# Altium PCB Axis_Channel_Blade.PcbDoc (part 1 of 2)
Units mm, origin at the board's own origin, x right, y up, seen from the top; angles counter-clockwise.
Board outline 100 x 100 mm, 4 copper layers (Top Layer 1, L2_GND, L3_PWR, Bottom Layer 1), stack 1.556 mm thick; 170 components, 613 nets, 644 pads, 0 vias.
Unrouted connection lines stored in the file: 341.
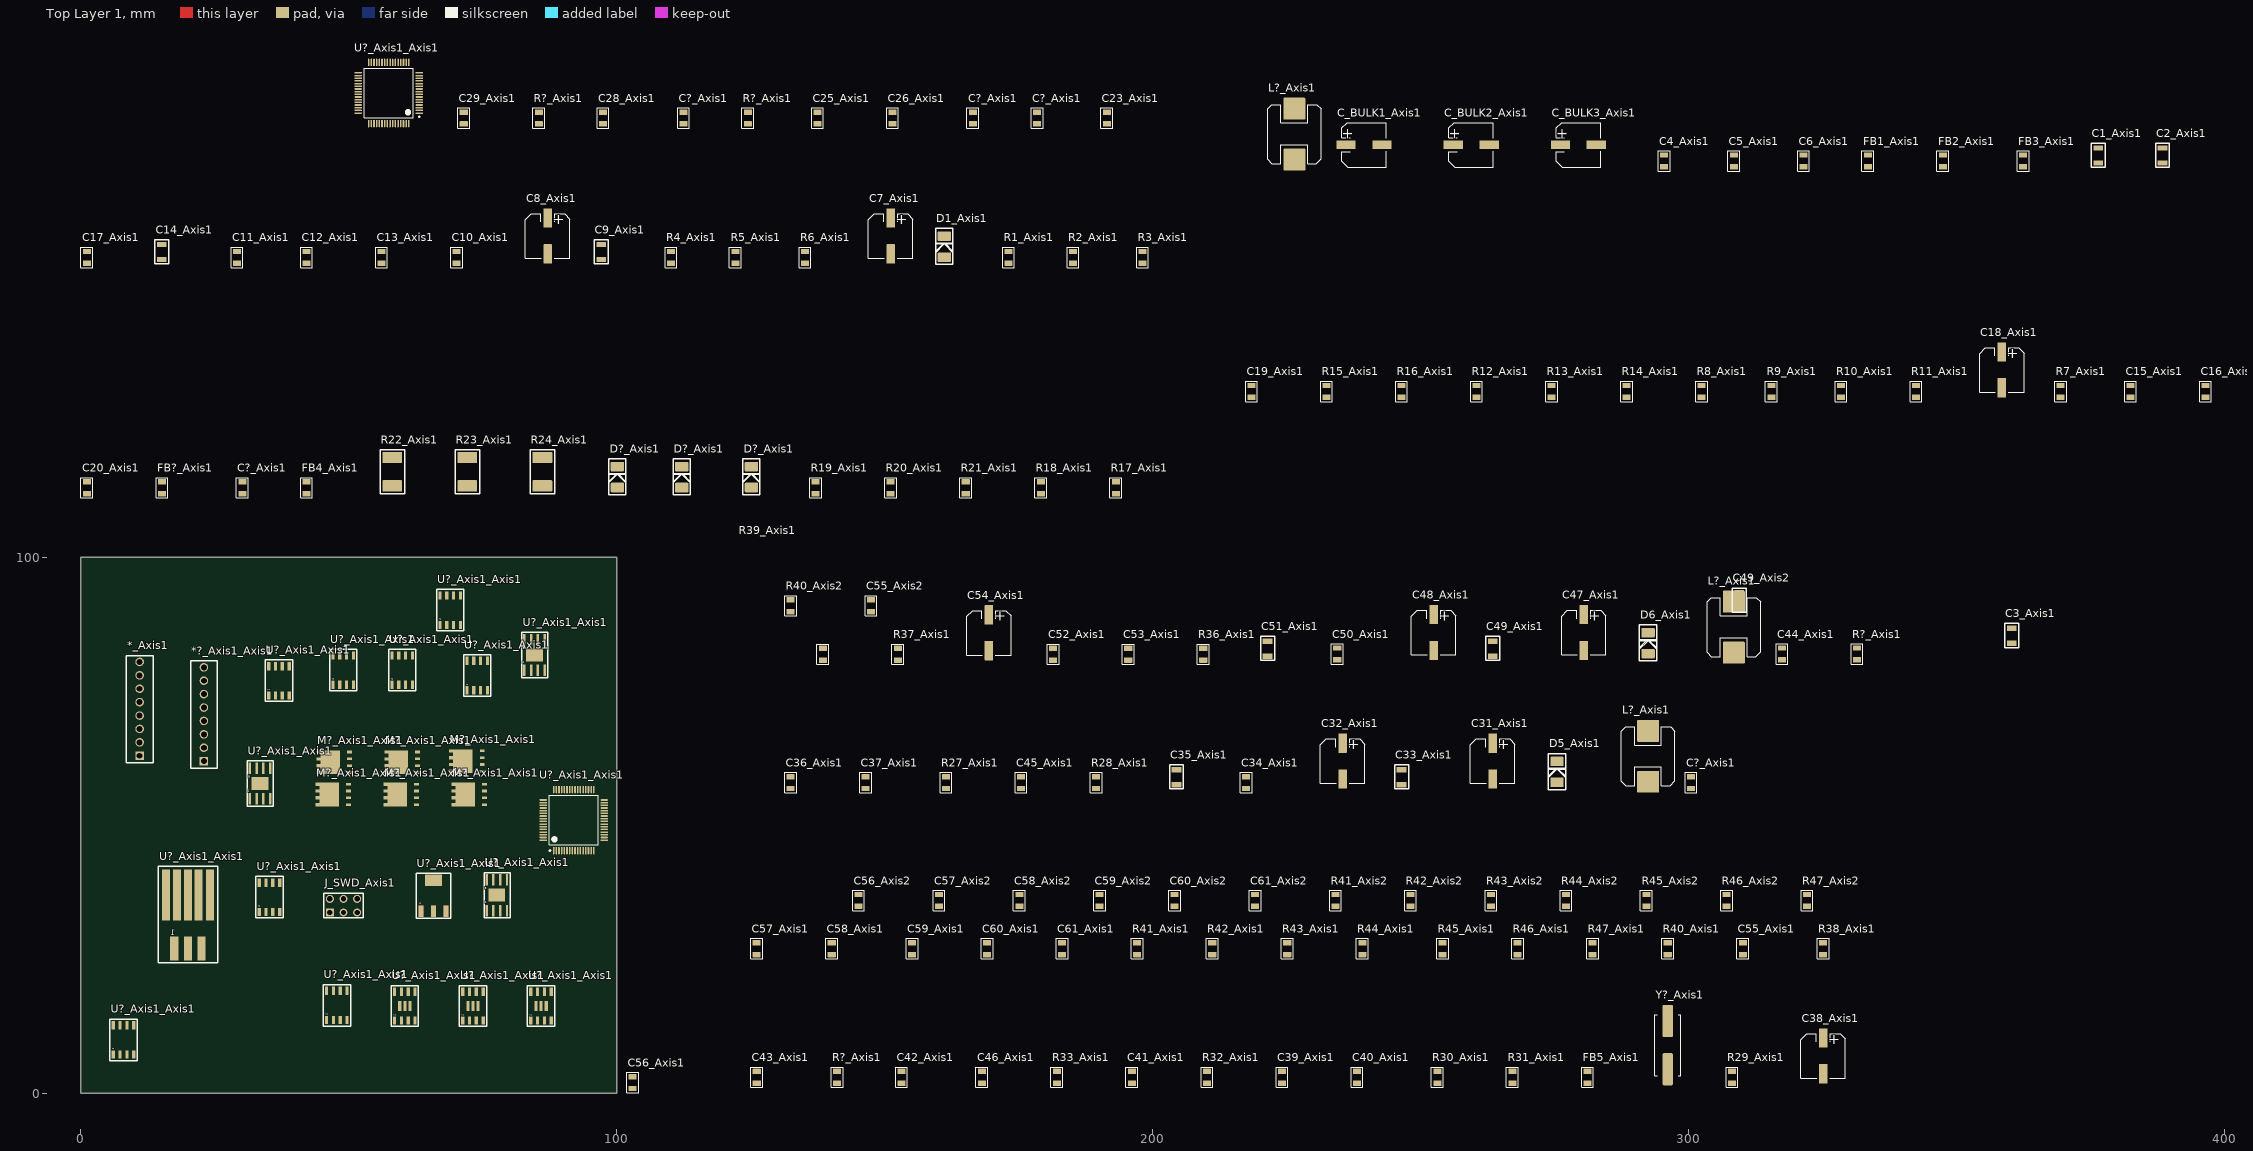
[diagram p0: Top Layer 1 view]
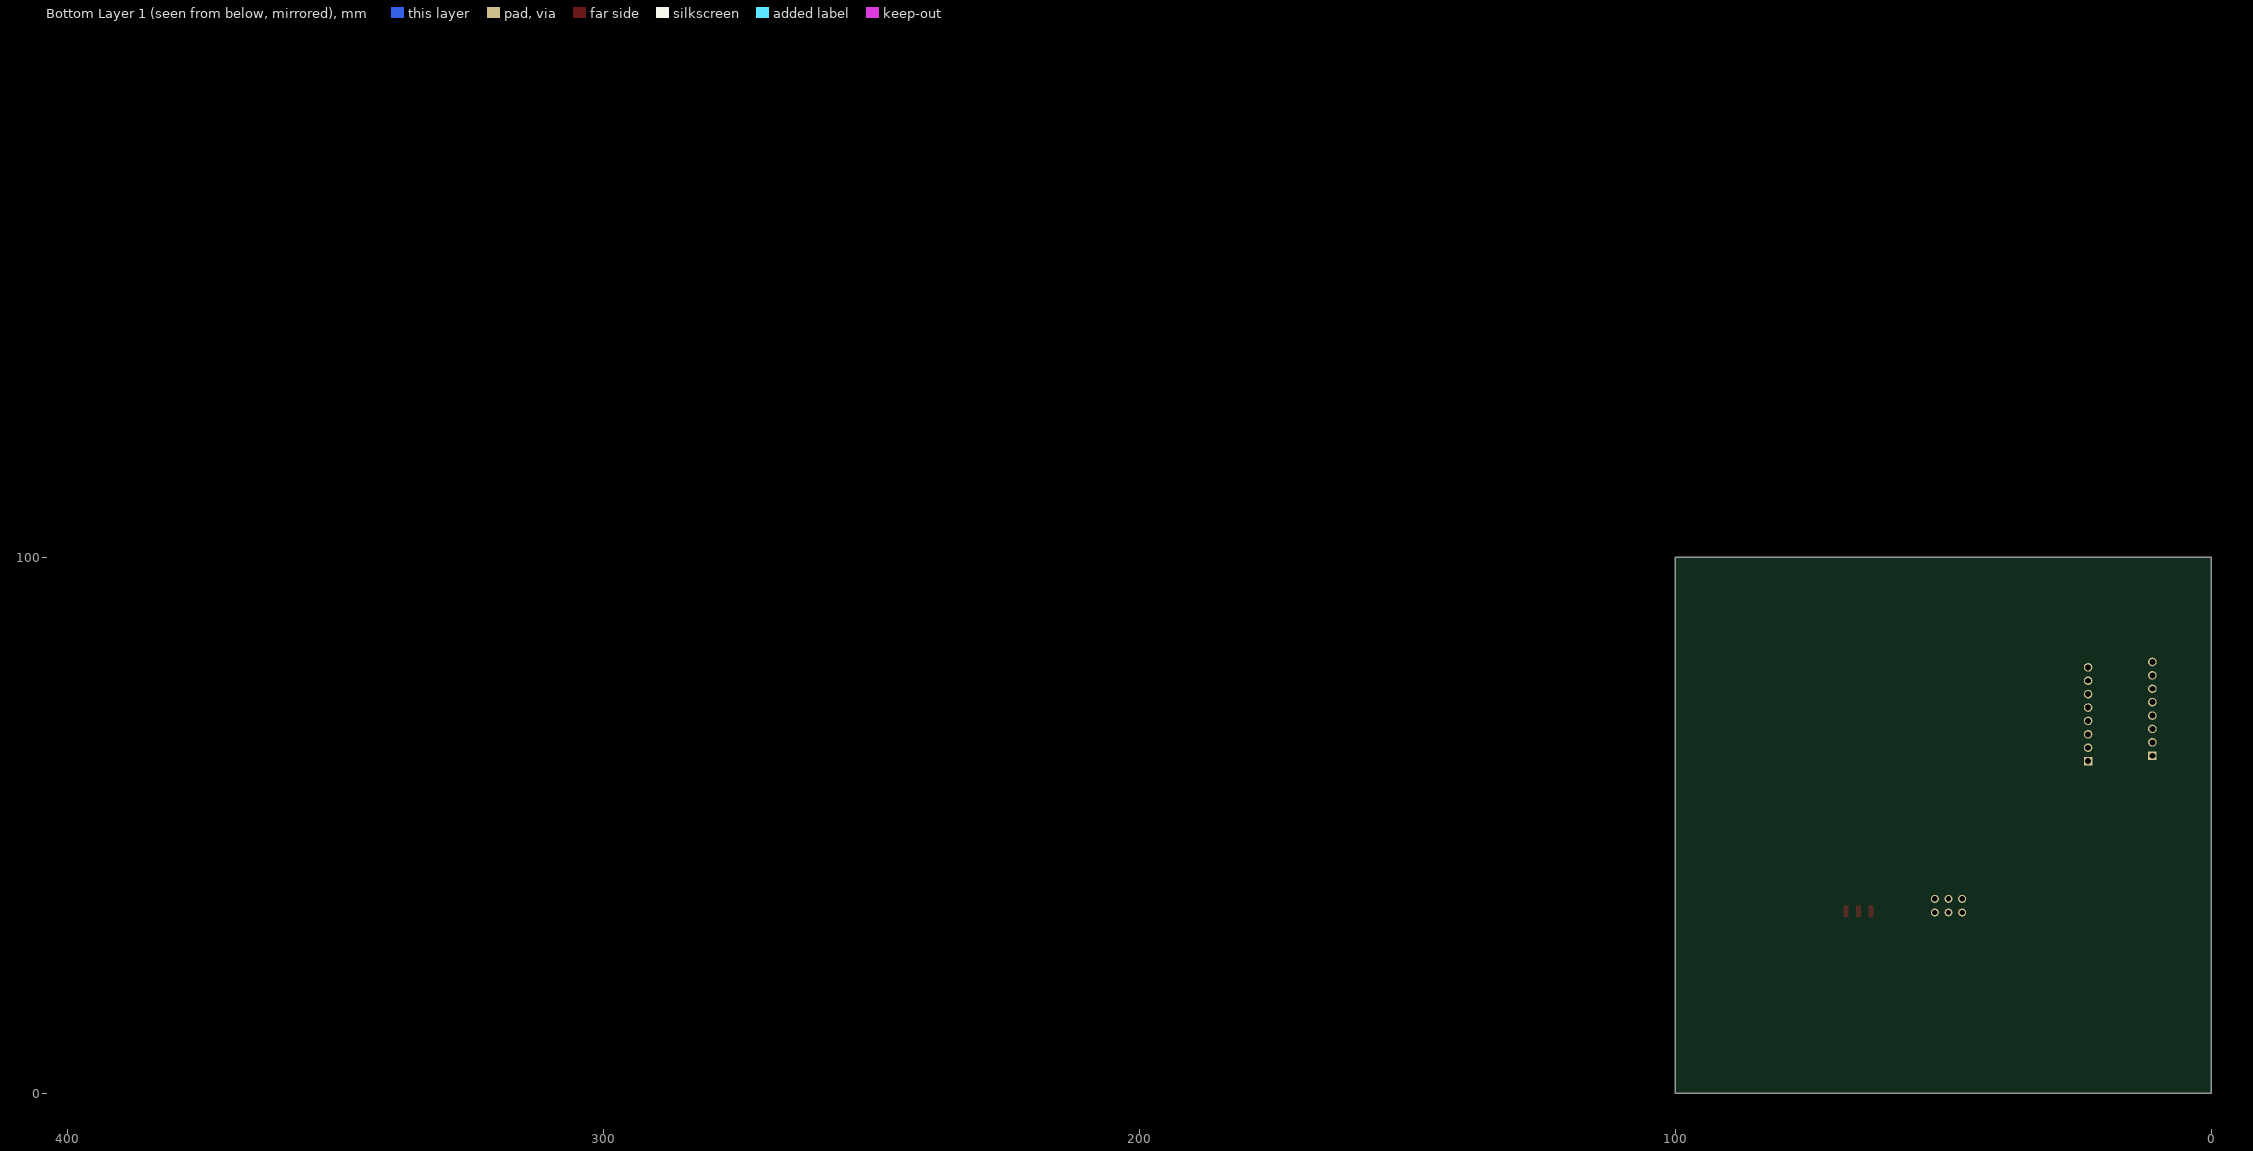
[diagram p1: Bottom Layer 1 view, seen from below]
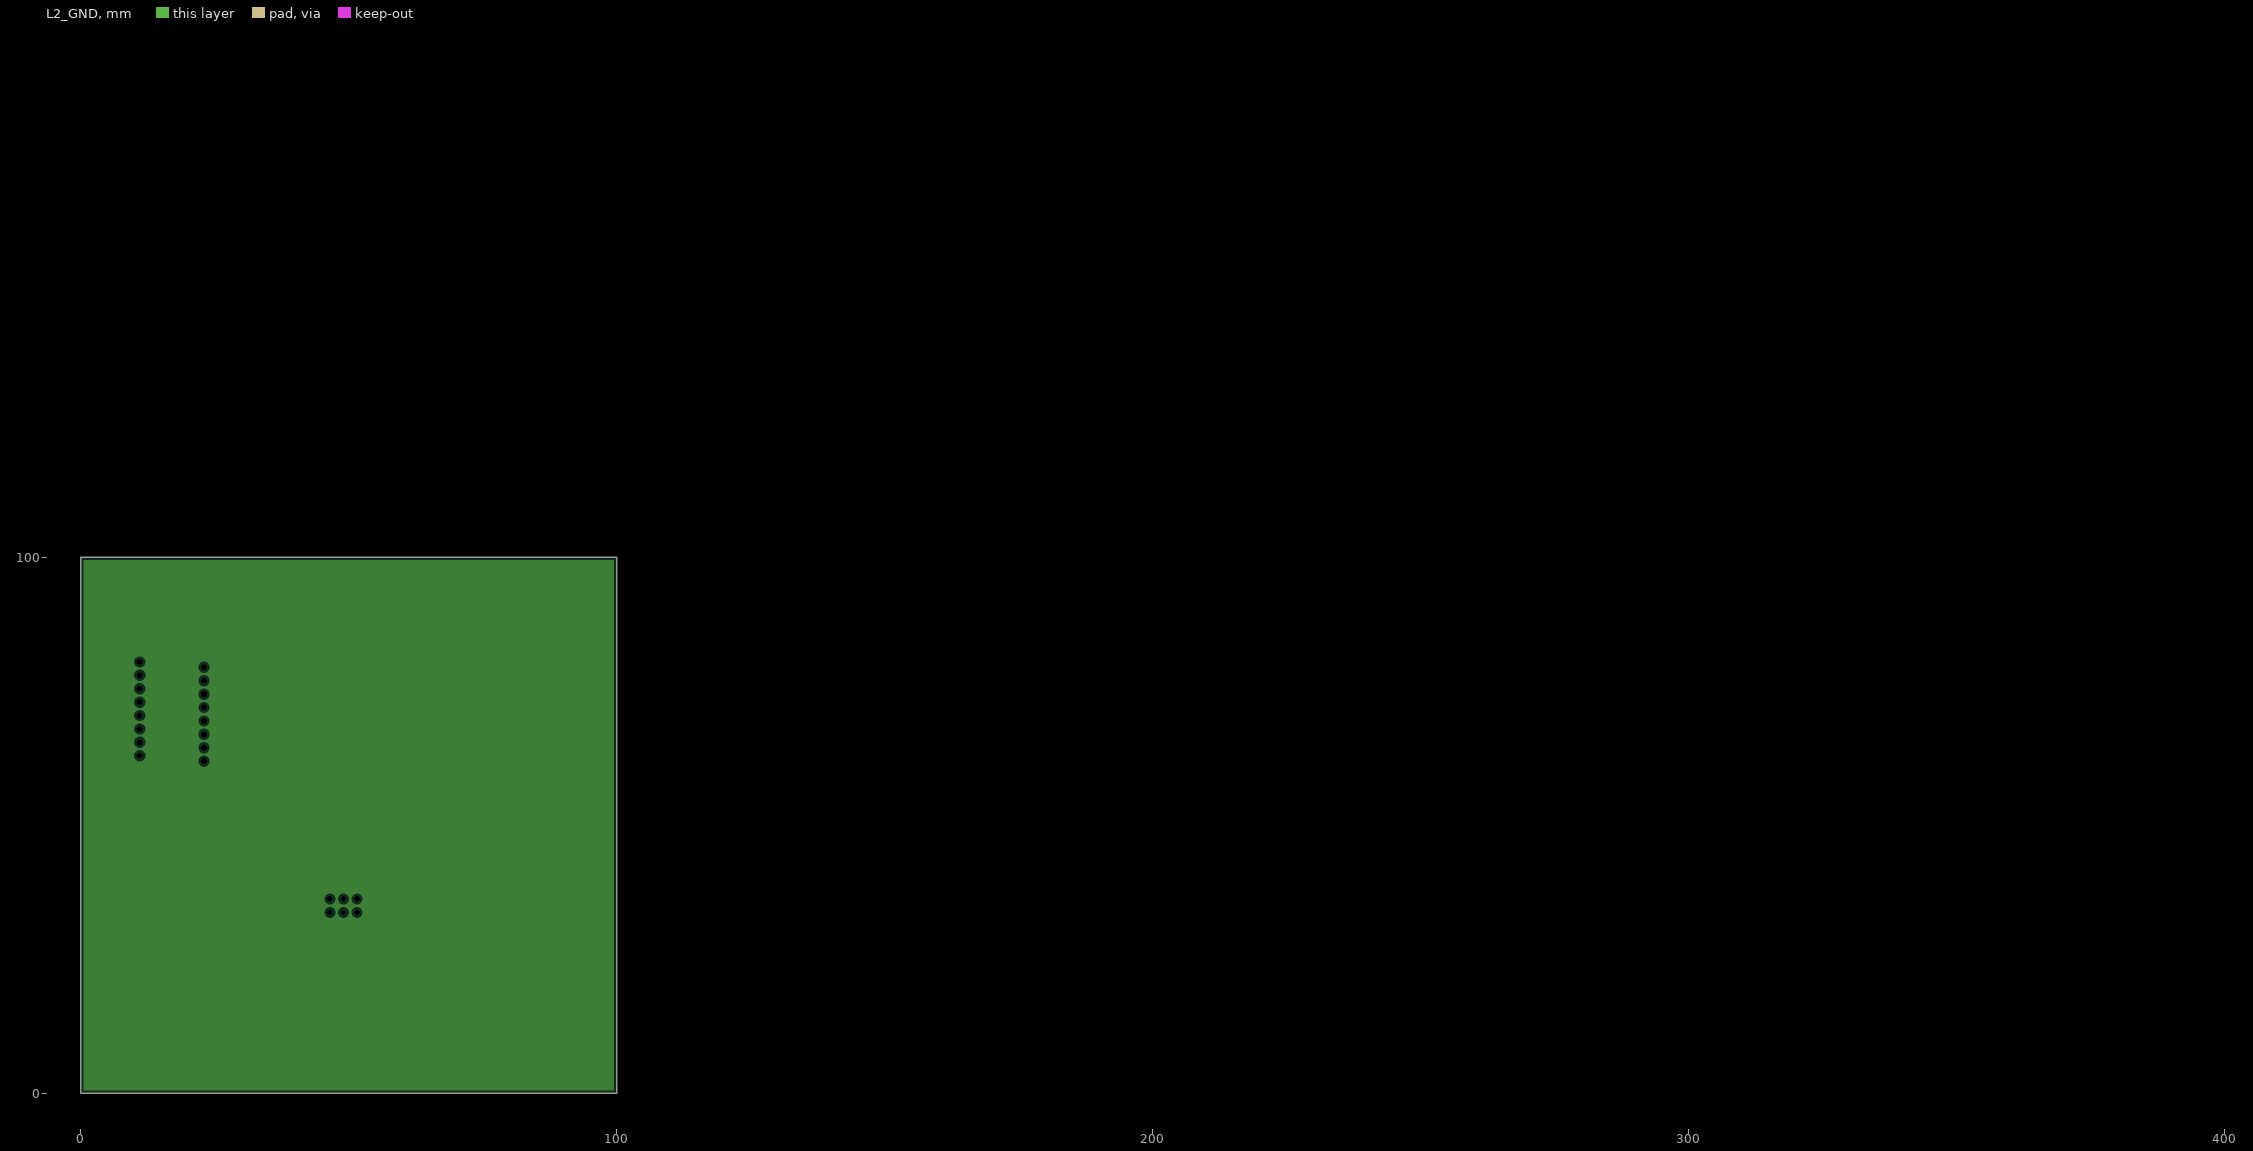
[diagram p2: L2_GND, clearances drawn from the general rule]
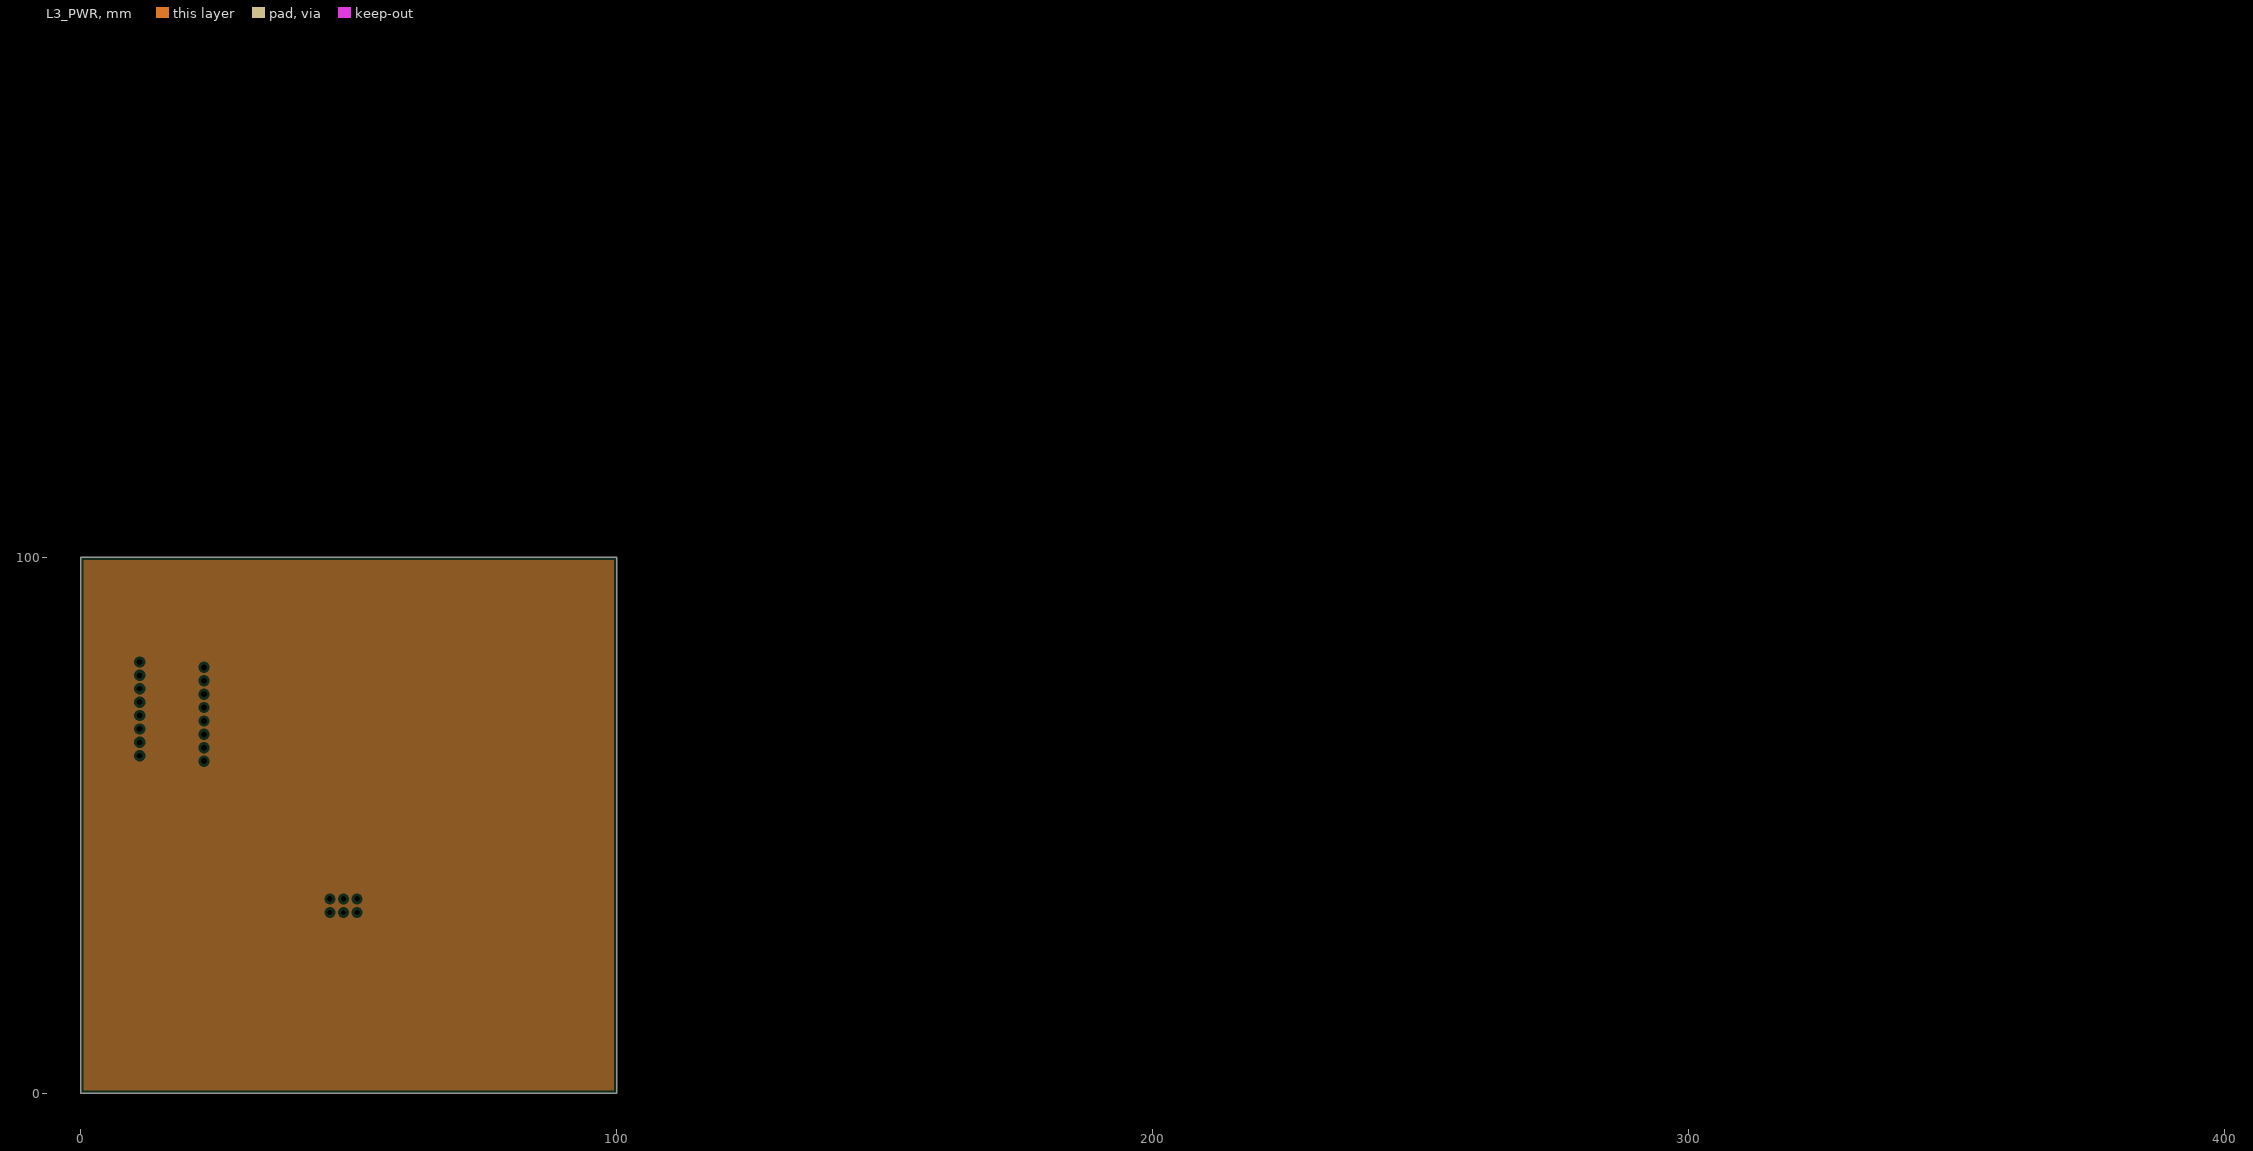
[diagram p3: L3_PWR, clearances drawn from the general rule]

## Layer stack, top to bottom
Top Solder: solder mask 0.0102, Solder Resist, Dk 3.5
Top Layer 1: signal copper 0.035
Dielectric 2: prepreg 0.1999, FR-4, Dk 4.2
L2_GND: plane copper 0.035
Dielectric 1: dielectric 1.016, FR-4, Dk 4.8
L3_PWR: plane copper 0.035
Dielectric 3: prepreg 0.1999, FR-4, Dk 4.2
Bottom Layer 1: signal copper 0.035
Bottom Solder: solder mask 0.0102, Solder Resist, Dk 3.5

## Board outline
0,0 100,0 100,99 100,100 0,100

## Design rules (kind name [scope] priority, off if disabled: settings)
Clearance Clearance_Analog_vs_PowerOutput [InNetClass('ANALOG') vs InNetClass('POWER_OUTPUT')] p1: gap=1 ignorepadtopadclearanceinfootprint=FALSE
Clearance Clearance_PowerOutput_vs_Digital [InNetClass('POWER_OUTPUT') vs InNetClass('HIGH_SPEED')] p2: gap=0.5 ignorepadtopadclearanceinfootprint=FALSE
Clearance Clearance_Analog_Global [InNetClass('ANALOG') vs InNetClass('All Nets')] p3: gap=0.4 ignorepadtopadclearanceinfootprint=FALSE
Clearance Clearance_Global [All] p4: gap=0.2 ignorepadtopadclearanceinfootprint=FALSE
DiffPairsRouting DiffPairs_Encoder [InDifferentialPairClass('All Differential Pairs')] p1: maxlimit=0.3 minlimit=0.15 mostfreqgap=0.2 toplayer_minwidth=0.15 toplayer_maxwidth=0.3 toplayer_prefwidth=0.2 bottomlayer_minwidth=0.15 bottomlayer_maxwidth=0.3 bottomlayer_prefwidth=0.2 maxuncoupledlength=12.7
MatchedLengths MatchedLength_SPI [InNetClass('SPI')] p1: tolerance=2 checknetsindiffpair=FALSE checkdiffpairvsdiffpair=TRUE checkxsignals=TRUE checkothers=TRUE
PlaneClearance [All] p1: clearance=0.508
PlaneConnect [All] p1: planeconnectstyle=Relief reliefexpansion=0.508 reliefentries=4 reliefconductorwidth=0.254 reliefairgap=0.254
PolygonConnect PolyConnect_SuperSO8 [HasFootprint('SuperSO8')] p1: connectstyle=Direct reliefconductorwidth=0.254 reliefentries=4 polygonreliefangle="90 Angle" airgapwidth=0.254
PolygonConnect PolyConnect_HSOIC-8-DDA [HasFootprint('HSOIC-8-DDA')] p2: connectstyle=Direct reliefconductorwidth=0.254 reliefentries=4 polygonreliefangle="90 Angle" airgapwidth=0.254
PolygonConnect PolyConnect_SOIC-8_PAD [HasFootprint('SOIC-8_PowerPAD_DDA')] p3: connectstyle=Direct reliefconductorwidth=0.254 reliefentries=4 polygonreliefangle="90 Angle" airgapwidth=0.254
PolygonConnect PolyConnect_Relief [All] p4: connectstyle=Relief reliefconductorwidth=0.5 reliefentries=4 polygonreliefangle="90 Angle" airgapwidth=0.3
RoutingVias Via_Power [InNetClass('POWER')] p1: holewidth=0.5 width=1 viastyle="Through Hole" minholewidth=0.4 minwidth=0.8 maxholewidth=0.8 maxwidth=1.5
RoutingVias Via_Power_Output [InNetClass('POWER_OUTPUT')] p2: holewidth=0.5 width=1 viastyle="Through Hole" minholewidth=0.4 minwidth=0.8 maxholewidth=0.8 maxwidth=1.5
RoutingVias Via_Signal [All] p3: holewidth=0.3 width=0.6 viastyle="Through Hole" minholewidth=0.25 minwidth=0.5 maxholewidth=0.5 maxwidth=1
SolderMaskExpansion [All] p1: expansion=0.102 istentingtop=FALSE
SupplyNets "Schematic Supply Nets_10" [InNet('AMP1 IN-_Axis1')] p1: voltage=0.000
SupplyNets "Schematic Supply Nets_3" [InNet('MAIN VCC')] p2: voltage=0.000
SupplyNets "Schematic Supply Nets_5" [InNet('DGND')] p3: voltage=0.000
SupplyNets "Schematic Supply Nets_9" [InNet('AMP2 IN-_Axis1')] p4: voltage=0.000
SupplyNets "Schematic Supply Nets_8" [InNet('+4')] p5: voltage=0.000
SupplyNets "Schematic Supply Nets_7" [InNet('+6')] p6: voltage=0.000
SupplyNets "Schematic Supply Nets_6" [InNet('AGND')] p7: voltage=0.000
SupplyNets "Schematic Supply Nets_4" [InNet('+3.3')] p8: voltage=0.000
SupplyNets "Schematic Supply Nets_2" [InNet('GND')] p9: voltage=0.000
SupplyNets "Schematic Supply Nets_1" [InNet('+12')] p10: voltage=0.000
SupplyNets "Schematic Supply Nets" [InNet('+5')] p11: voltage=0.000
Width Width_Power_Output [InNetClass('POWER_OUTPUT')] p1: maxlimit=5 minlimit=1.5 preferedwidth=2
Width Width_Power [InNetClass('POWER')] p2: maxlimit=3 minlimit=0.8 preferedwidth=1.5
Width Width_Analog [InNetClass('ANALOG')] p3: maxlimit=0.8 minlimit=0.25 preferedwidth=0.4
Width Width_Digital [InNetClass('HIGH_SPEED')] p4: maxlimit=0.5 minlimit=0.15 preferedwidth=0.2
27 further rules are at their usual default settings.

## Classes and differential pairs
net class SPI: CS_Axis1 CS_Axis2 CS_Axis3 CS_Axis4 CS_Axis5 CS_Axis6 MISO_Axis1 MISO_Axis2 MISO_Axis3 MISO_Axis4 MISO_Axis5 MISO_Axis6 MOSI_Axis1 MOSI_Axis2 MOSI_Axis3 MOSI_Axis4 MOSI_Axis5 MOSI_Axis6 SCK_Axis1 SCK_Axis2 SCK_Axis3 SCK_Axis4 SCK_Axis5 SCK_Axis6 SWCLK_Axis1 SWCLK_Axis2 SWCLK_Axis3 SWCLK_Axis4 SWCLK_Axis5 SWCLK_Axis6 SWDIO_Axis1 SWDIO_Axis2 SWDIO_Axis3 SWDIO_Axis4 SWDIO_Axis5 SWDIO_Axis6
net class POWER_OUTPUT: Va_Axis1 Va_Axis2 Va_Axis3 Va_Axis4 Va_Axis5 Va_Axis6 Vb_Axis1 Vb_Axis2 Vb_Axis3 Vb_Axis4 Vb_Axis5 Vb_Axis6 Vc_Axis1 Vc_Axis2 Vc_Axis3 Vc_Axis4 Vc_Axis5 Vc_Axis6
net class ANALOG: "AMP1 IN+_Axis1" "AMP1 IN+_Axis2" "AMP1 IN+_Axis3" "AMP1 IN+_Axis4" "AMP1 IN+_Axis5" "AMP1 IN+_Axis6" "AMP1 IN-_Axis1" "AMP1 IN-_Axis2" "AMP1 IN-_Axis3" "AMP1 IN-_Axis4" "AMP1 IN-_Axis5" "AMP1 IN-_Axis6" "AMP2 IN+_Axis1" "AMP2 IN+_Axis2" "AMP2 IN+_Axis3" "AMP2 IN+_Axis4" "AMP2 IN+_Axis5" "AMP2 IN+_Axis6"
net class HIGH_SPEED: A1_Axis1 A1_Axis2 A1_Axis3 A1_Axis4 A1_Axis5 A1_Axis6 A2_Axis1 A2_Axis2 A2_Axis3 A2_Axis4 A2_Axis5 A2_Axis6 B1_Axis1 B1_Axis2 B1_Axis3 B1_Axis4 B1_Axis5 B1_Axis6 B2_Axis1 B2_Axis2 B2_Axis3 B2_Axis4 B2_Axis5 B2_Axis6 MISO_Axis1 MISO_Axis2 MISO_Axis3 MISO_Axis4 MISO_Axis5 MISO_Axis6 MOSI_Axis1 MOSI_Axis2 MOSI_Axis3 MOSI_Axis4 MOSI_Axis5 MOSI_Axis6 "PWM AH_Axis1" "PWM AH_Axis2" "PWM AH_Axis3" "PWM AH_Axis4" "PWM AH_Axis5" "PWM AH_Axis6" "PWM AL_Axis1" "PWM AL_Axis2" "PWM AL_Axis3" "PWM AL_Axis4" "PWM AL_Axis5" "PWM AL_Axis6" "PWM BH_Axis1" "PWM BH_Axis2" "PWM BH_Axis3" "PWM BH_Axis4" "PWM BH_Axis5" "PWM BH_Axis6" "PWM BL_Axis1" "PWM BL_Axis2" "PWM BL_Axis3" "PWM BL_Axis4" "PWM BL_Axis5" "PWM BL_Axis6" "PWM CH_Axis1" "PWM CH_Axis2" "PWM CH_Axis3" "PWM CH_Axis4" "PWM CH_Axis5" "PWM CH_Axis6" "PWM CL_Axis1" "PWM CL_Axis2" "PWM CL_Axis3" "PWM CL_Axis4" "PWM CL_Axis5" "PWM CL_Axis6" SCK_Axis1 SCK_Axis2 SCK_Axis3 SCK_Axis4 SCK_Axis5 SCK_Axis6 SWCLK_Axis1 SWCLK_Axis2 SWCLK_Axis3 SWCLK_Axis4 SWCLK_Axis5 SWCLK_Axis6 SWDIO_Axis1 SWDIO_Axis2 SWDIO_Axis3 SWDIO_Axis4 SWDIO_Axis5 SWDIO_Axis6 Z1_Axis1 Z1_Axis2 Z1_Axis3 Z1_Axis4 Z1_Axis5 Z1_Axis6 Z2_Axis1 Z2_Axis2 Z2_Axis3 Z2_Axis4 Z2_Axis5 Z2_Axis6
net class POWER: +3.3 +5 +12 "MAIN VCC"
channel class Axis_Channel: Axis1 Axis2 Axis3 Axis4 Axis5 Axis6
component class Axis6: C_BULK?_Axis6
component class Axis5: C_BULK?_Axis5
component class Axis4: C_BULK?_Axis4
component class Axis3: C_BULK?_Axis3
component class Axis2: C49_Axis2 C55_Axis2 C56_Axis2 C57_Axis2 C58_Axis2 C59_Axis2 C60_Axis2 C61_Axis2 C_BULK?_Axis2 R40_Axis2 R41_Axis2 R42_Axis2 R43_Axis2 R44_Axis2 R45_Axis2 R46_Axis2 R47_Axis2
component class Axis1: *?_Axis1_Axis1 *_Axis1 C1_Axis1 C2_Axis1 C3_Axis1 C4_Axis1 C5_Axis1 C6_Axis1 C7_Axis1 C8_Axis1 C9_Axis1 C10_Axis1 C11_Axis1 C12_Axis1 C13_Axis1 C14_Axis1 C15_Axis1 C16_Axis1 C17_Axis1 C18_Axis1 C19_Axis1 C20_Axis1 C23_Axis1 C25_Axis1 C26_Axis1 C28_Axis1 C29_Axis1 C31_Axis1 C32_Axis1 C33_Axis1 C34_Axis1 C35_Axis1 C36_Axis1 C37_Axis1 C38_Axis1 C39_Axis1 C40_Axis1 C41_Axis1 C42_Axis1 C43_Axis1 C44_Axis1 C45_Axis1 C46_Axis1 C47_Axis1 C48_Axis1 C49_Axis1 C50_Axis1 C51_Axis1 C52_Axis1 C53_Axis1 C54_Axis1 C55_Axis1 C56_Axis1 C57_Axis1 C58_Axis1 C59_Axis1 C60_Axis1 C61_Axis1 C?_Axis1 C_BULK1_Axis1 C_BULK2_Axis1 C_BULK3_Axis1 C_BULK?_Axis1 D1_Axis1 D5_Axis1 D6_Axis1 D?_Axis1 FB1_Axis1 FB2_Axis1 FB3_Axis1 FB4_Axis1 FB5_Axis1 FB?_Axis1 J_SWD_Axis1 L?_Axis1 M?_Axis1_Axis1 R1_Axis1 R2_Axis1 R3_Axis1 R4_Axis1 R5_Axis1 R6_Axis1 R7_Axis1 R8_Axis1 R9_Axis1 R10_Axis1 R11_Axis1 R12_Axis1 R13_Axis1 R14_Axis1 R15_Axis1 R16_Axis1 R17_Axis1 R18_Axis1 R19_Axis1 R20_Axis1 R21_Axis1 R22_Axis1 R23_Axis1 R24_Axis1 R27_Axis1 R28_Axis1 R29_Axis1 R30_Axis1 R31_Axis1 R32_Axis1 R33_Axis1 R36_Axis1 R37_Axis1 R38_Axis1 R39_Axis1 R40_Axis1 R41_Axis1 R42_Axis1 R43_Axis1 R44_Axis1 R45_Axis1 R46_Axis1 R47_Axis1 R?_Axis1 U?_Axis1_Axis1 Y?_Axis1
differential pair Z2_Axis6: +Z2_Axis6_P -Z2_Axis6_N
differential pair Z2_Axis5: +Z2_Axis5_P -Z2_Axis5_N
differential pair Z2_Axis4: +Z2_Axis4_P -Z2_Axis4_N
differential pair Z2_Axis3: +Z2_Axis3_P -Z2_Axis3_N
differential pair Z2_Axis2: +Z2_Axis2_P -Z2_Axis2_N
differential pair Z2_Axis1: +Z2_Axis1_P -Z2_Axis1_N
differential pair Z1_Axis6: +Z1_Axis6_P -Z1_Axis6_N
differential pair Z1_Axis5: +Z1_Axis5_P -Z1_Axis5_N
differential pair Z1_Axis4: +Z1_Axis4_P -Z1_Axis4_N
differential pair Z1_Axis3: +Z1_Axis3_P -Z1_Axis3_N
differential pair Z1_Axis2: +Z1_Axis2_P -Z1_Axis2_N
differential pair Z1_Axis1: +Z1_Axis1_P -Z1_Axis1_N
differential pair B2_Axis6: +B2_Axis6_P -B2_Axis6_N
differential pair B2_Axis5: +B2_Axis5_P -B2_Axis5_N
differential pair B2_Axis4: +B2_Axis4_P -B2_Axis4_N
differential pair B2_Axis3: +B2_Axis3_P -B2_Axis3_N
differential pair B2_Axis2: +B2_Axis2_P -B2_Axis2_N
differential pair B2_Axis1: +B2_Axis1_P -B2_Axis1_N
differential pair B1_Axis6: +B1_Axis6_P -B1_Axis6_N
differential pair B1_Axis5: +B1_Axis5_P -B1_Axis5_N
differential pair B1_Axis4: +B1_Axis4_P -B1_Axis4_N
differential pair B1_Axis3: +B1_Axis3_P -B1_Axis3_N
differential pair B1_Axis2: +B1_Axis2_P -B1_Axis2_N
differential pair B1_Axis1: +B1_Axis1_P -B1_Axis1_N
differential pair A2_Axis6: +A2_Axis6_P -A2_Axis6_N
differential pair A2_Axis5: +A2_Axis5_P -A2_Axis5_N
differential pair A2_Axis4: +A2_Axis4_P -A2_Axis4_N
differential pair A2_Axis3: +A2_Axis3_P -A2_Axis3_N
differential pair A2_Axis2: +A2_Axis2_P -A2_Axis2_N
differential pair A2_Axis1: +A2_Axis1_P -A2_Axis1_N
differential pair A1_Axis6: +A1_Axis6_P -A1_Axis6_N
differential pair A1_Axis5: +A1_Axis5_P -A1_Axis5_N
differential pair A1_Axis4: +A1_Axis4_P -A1_Axis4_N
differential pair A1_Axis3: +A1_Axis3_P -A1_Axis3_N
differential pair A1_Axis2: +A1_Axis2_P -A1_Axis2_N
differential pair A1_Axis1: +A1_Axis1_P -A1_Axis1_N

## Components (designator, comment, footprint, x,y, rotation, side; value= is the part's Value field where it differs from the comment)
*?_Axis1_Axis1 "JST/MOLEX_8pin" B8B-EH-A-(LF)(SN) 23.024,70.694 r90 top (schematic designator *?_Axis1)
*_Axis1 "JST/MOLEX_8pin" B8B-EH-A-(LF)(SN) 11.024,71.694 r90 top (schematic designator *)
C1_Axis1 "Capacitor 1206" 1206 376.475,175 r90 top value=4.7u (schematic designator C1)
C2_Axis1 "Capacitor 1206" 1206 388.475,175 r90 top value=4.7u (schematic designator C2)
C3_Axis1 "Capacitor 1206" 1206 360.325,85.4 r90 top value=4.7u (schematic designator C3)
C4_Axis1 "Capacitor 0805" 0805 295.475,174 r90 top value=100n (schematic designator C4)
C5_Axis1 "Capacitor 0805" 0805 308.475,174 r90 top value=100n (schematic designator C5)
C6_Axis1 "Capacitor 0805" 0805 321.475,174 r90 top value=100n (schematic designator C6)
C7_Axis1 "Alum SMD Cap" "ECAP SMD 8x10.5" 151.15,160 r0 top value=100u (schematic designator C7)
C8_Axis1 "Alum SMD Cap" "ECAP SMD 8x10.5" 87.15,160 r0 top value=100u (schematic designator C8)
C9_Axis1 "Capacitor 1206" 1206 97.15,157 r90 top value=2.2u (schematic designator C9)
C10_Axis1 "Capacitor 0805" 0805 70.15,156 r90 top value=5n (schematic designator C10)
C11_Axis1 "Capacitor 0805" 0805 29.15,156 r90 top value=220n (schematic designator C11)
C12_Axis1 "Capacitor 0805" 0805 42.15,156 r90 top value=220n (schematic designator C12)
C13_Axis1 "Capacitor 0805" 0805 56.15,156 r90 top value=220n (schematic designator C13)
C14_Axis1 "Capacitor 1206" 1206 15.15,157 r90 top value=4.7u (schematic designator C14)
C15_Axis1 "Capacitor 0805" 0805 382.481,131 r90 top value=1n (schematic designator C15)
C16_Axis1 "Capacitor 0805" 0805 396.481,131 r90 top value=1n (schematic designator C16)
C17_Axis1 "Capacitor 0805" 0805 1.15,156 r90 top value=1n (schematic designator C17)
C18_Axis1 "Alum SMD Cap" "ECAP SMD 8x10.5" 358.481,135 r0 top value=100u (schematic designator C18)
C19_Axis1 "Capacitor 0805" 0805 218.481,131 r90 top value=15n (schematic designator C19)
C20_Axis1 "Capacitor 0805" 0805 1.156,113 r90 top value=100n (schematic designator C20)
C23_Axis1 "Capacitor 0805" 0805 191.481,182 r90 top value=100n (schematic designator C23)
C25_Axis1 "Capacitor 0805" 0805 137.481,182 r90 top value=100n (schematic designator C25)
C26_Axis1 "Capacitor 0805" 0805 151.481,182 r90 top value=1u (schematic designator C26)
C28_Axis1 "Capacitor 0805" 0805 97.481,182 r90 top value=100n (schematic designator C28)
C29_Axis1 "Capacitor 0805" 0805 71.481,182 r90 top value=100n (schematic designator C29)
C31_Axis1 "Alum SMD Cap" "ECAP SMD 8x10.5" 263.481,62 r0 top value=100u (schematic designator C31)
C32_Axis1 "Alum SMD Cap" "ECAP SMD 8x10.5" 235.481,62 r0 top value=100u (schematic designator C32)
C33_Axis1 "Capacitor 1206" 1206 246.481,59 r90 top value=2.2u (schematic designator C33)
C34_Axis1 "Capacitor 0805" 0805 217.481,58 r90 top value=5n (schematic designator C34)
C35_Axis1 "Capacitor 1206" 1206 204.481,59 r90 top value=4.7u (schematic designator C35)
C36_Axis1 "Capacitor 0805" 0805 132.481,58 r90 top value=0.33u (schematic designator C36)
C37_Axis1 "Capacitor 0805" 0805 146.481,58 r90 top value=0.1u (schematic designator C37)
C38_Axis1 "Alum SMD Cap" "ECAP SMD 8x10.5" 325.156,7 r0 top value=100u (schematic designator C38)
C39_Axis1 "Capacitor 0805" 0805 224.156,3 r90 top value=15n (schematic designator C39)
C40_Axis1 "Cap" 0805 238.156,3 r90 top (schematic designator C40)
C41_Axis1 "Capacitor 0805" 0805 196.156,3 r90 top value=100n (schematic designator C41)
C42_Axis1 "Cap" 0805 153.156,3 r90 top value=30p (schematic designator C42)
C43_Axis1 "Cap" 0805 126.156,3 r90 top (schematic designator C43)
C44_Axis1 "Cap" 0805 317.475,82 r90 top (schematic designator C44)
C45_Axis1 "Capacitor 0805" 0805 175.481,58 r90 top value=22p (schematic designator C45)
C46_Axis1 "Capacitor 0805" 0805 168.156,3 r90 top value=22p (schematic designator C46)
C47_Axis1 "Alum SMD Cap" "ECAP SMD 8x10.5" 280.475,86 r0 top value=100u (schematic designator C47)
C48_Axis1 "Alum SMD Cap" "ECAP SMD 8x10.5" 252.475,86 r0 top value=100u (schematic designator C48)
C49_Axis1 "Capacitor 1206" 1206 263.475,83 r90 top value=2.2u (schematic designator C49)
C49_Axis2 "Capacitor 1206" 1206 309.475,92 r90 top value=2.2u (schematic designator C49)
C50_Axis1 "Capacitor 0805" 0805 234.475,82 r90 top value=5n (schematic designator C50)
C51_Axis1 "Capacitor 1206" 1206 221.475,83 r90 top value=4.7u (schematic designator C51)
C52_Axis1 "Capacitor 0805" 0805 181.475,81.95 r90 top value=0.33u (schematic designator C52)
C53_Axis1 "Capacitor 0805" 0805 195.475,81.95 r90 top value=0.1u (schematic designator C53)
C54_Axis1 "Alum SMD Cap" "ECAP SMD 8x10.5" 169.475,85.95 r0 top value=100u (schematic designator C54)
C55_Axis1 "Capacitor 0805" 0805 310.15,27 r90 top value=15n (schematic designator C55)
C55_Axis2 "Capacitor 0805" 0805 147.475,91 r90 top value=15n (schematic designator C55)
C56_Axis1 "Capacitor 0805" 0805 103,2 r90 top value=33p (schematic designator C56)
C56_Axis2 "Capacitor 0805" 0805 145.15,36 r90 top value=33p (schematic designator C56)
C57_Axis1 "Capacitor 0805" 0805 126.15,27 r90 top value=33p (schematic designator C57)
C57_Axis2 "Capacitor 0805" 0805 160.15,36 r90 top value=33p (schematic designator C57)
C58_Axis1 "Capacitor 0805" 0805 140.15,27 r90 top value=33p (schematic designator C58)
C58_Axis2 "Capacitor 0805" 0805 175.15,36 r90 top value=33p (schematic designator C58)
C59_Axis1 "Capacitor 0805" 0805 155.15,27 r90 top value=33p (schematic designator C59)
C59_Axis2 "Capacitor 0805" 0805 190.15,36 r90 top value=33p (schematic designator C59)
C60_Axis1 "Capacitor 0805" 0805 169.15,27 r90 top value=33p (schematic designator C60)
C60_Axis2 "Capacitor 0805" 0805 204.15,36 r90 top value=33p (schematic designator C60)
C61_Axis1 "Capacitor 0805" 0805 183.15,27 r90 top value=33p (schematic designator C61)
C61_Axis2 "Capacitor 0805" 0805 219.15,36 r90 top value=33p (schematic designator C61)
C?_Axis1 "Cap" 0805 178.481,182 r90 top (schematic designator C?)
C?_Axis1 "Cap" 0805 30.156,113 r90 top (schematic designator C?)
C?_Axis1 "Cap" 0805 300.481,58 r90 top (schematic designator C?)
C?_Axis1 "Capacitor 0805" 0805 166.481,182 r90 top value=1u (schematic designator C?)
C?_Axis1 "Cap" 0805 112.481,182 r90 top (schematic designator C?)
C_BULK1_Axis1 "Alum SMD Cap" "ECAP SMD 8x10.5" 239.475,177 r90 top value=220u (schematic designator C_BULK1)
C_BULK2_Axis1 "Alum SMD Cap" "ECAP SMD 8x10.5" 259.475,177 r90 top value=220u (schematic designator C_BULK2)
C_BULK3_Axis1 "Alum SMD Cap" "ECAP SMD 8x10.5" 279.475,177 r90 top value=220u (schematic designator C_BULK3)
D1_Axis1 "Schottky Diod" SMB 161.15,158 r90 top value=12V (schematic designator D1)
D5_Axis1 "Schottky Diod" SMB 275.481,60 r90 top value=12V (schematic designator D5)
D6_Axis1 "Schottky Diod" SMB 292.475,84 r90 top value=12V (schematic designator D6)
D?_Axis1 "Supressor Dual" SMB 125.156,115 r90 top (schematic designator D?)
D?_Axis1 "Supressor Dual" SMB 112.156,115 r90 top (schematic designator D?)
D?_Axis1 "Supressor Dual" SMB 100.156,115 r90 top (schematic designator D?)
FB1_Axis1 "Ferrite Bead" 0805 333.475,174 r90 top value=1K (schematic designator FB1)
FB2_Axis1 "Ferrite Bead" 0805 347.475,174 r90 top value=1K (schematic designator FB2)
FB3_Axis1 "Ferrite Bead" 0805 362.475,174 r90 top value=1K (schematic designator FB3)
FB4_Axis1 "Ferrite Bead" 0805 42.156,113 r90 top value=1K (schematic designator FB4)
FB5_Axis1 "Ferrite Bead" 0805 281.156,3 r90 top value=1K (schematic designator FB5)
FB?_Axis1 "Ferrite Bead" 0805 15.156,113 r90 top value=1K (schematic designator FB?)
J_SWD_Axis1 "HEADER_2x3" HEADER_2x3 49.456,35.081 r90 top (schematic designator J_SWD)
L?_Axis1 "Inductor" "SMD IND 104CDMCCDS-220MC" 308.475,87 r90 top value=22u (schematic designator L?)
L?_Axis1 "Inductor" "SMD IND 104CDMCCDS-220MC" 226.475,179 r90 top value=22u (schematic designator L?)
L?_Axis1 "Inductor" "SMD IND 104CDMCCDS-220MC" 292.48,62.902 r90 top value=22u (schematic designator L?)
M?_Axis1_Axis1 "NTMFS3D5N08XT1G" SuperSO8 72,62 r90 top (schematic designator M?_Axis1)
M?_Axis1_Axis1 "NTMFS3D5N08XT1G" SuperSO8 47.043,55.782 r90 top (schematic designator M?_Axis1)
M?_Axis1_Axis1 "NTMFS3D5N08XT1G" SuperSO8 59.943,61.782 r90 top (schematic designator M?_Axis1)
M?_Axis1_Axis1 "NTMFS3D5N08XT1G" SuperSO8 59.743,55.782 r90 top (schematic designator M?_Axis1)
M?_Axis1_Axis1 "NTMFS3D5N08XT1G" SuperSO8 47.243,61.782 r90 top (schematic designator M?_Axis1)
M?_Axis1_Axis1 "NTMFS3D5N08XT1G" SuperSO8 72.443,55.782 r90 top (schematic designator M?_Axis1)
R1_Axis1 "Resistor 0805" 0805 173.15,156 r90 top value=20 (schematic designator R1)
R2_Axis1 "Resistor 0805" 0805 185.15,156 r90 top value=20 (schematic designator R2)
R3_Axis1 "Resistor 0805" 0805 198.15,156 r90 top value=20 (schematic designator R3)
R4_Axis1 "Resistor 0805" 0805 110.15,156 r90 top value=100K (schematic designator R4)
R5_Axis1 "Resistor 0805" 0805 122.15,156 r90 top value=100K (schematic designator R5)
R6_Axis1 "Resistor 0805" 0805 135.15,156 r90 top value=100K (schematic designator R6)
R7_Axis1 "Resistor 0805" 0805 369.481,131 r90 top value=140K (schematic designator R7)
R8_Axis1 "Resistor 0805" 0805 302.481,131 r90 top value=162K (schematic designator R8)
R9_Axis1 "Resistor 0805" 0805 315.481,131 r90 top value=10 (schematic designator R9)
R10_Axis1 "Resistor 0805" 0805 328.481,131 r90 top value=10 (schematic designator R10)
R11_Axis1 "Resistor 0805" 0805 342.481,131 r90 top value=10 (schematic designator R11)
R12_Axis1 "Resistor 0805" 0805 260.481,131 r90 top value=10 (schematic designator R12)
R13_Axis1 "Resistor 0805" 0805 274.481,131 r90 top value=10 (schematic designator R13)
R14_Axis1 "Resistor 0805" 0805 288.481,131 r90 top value=10 (schematic designator R14)
R15_Axis1 "Resistor 0805" 0805 232.481,131 r90 top value=10K (schematic designator R15)
R16_Axis1 "Resistor 0805" 0805 246.481,131 r90 top value=200K (schematic designator R16)
R17_Axis1 "Resistor 0805" 0805 193.156,113 r90 top value=15K (schematic designator R17)
R18_Axis1 "Resistor 0805" 0805 179.156,113 r90 top value=20K (schematic designator R18)
R19_Axis1 "Resistor 0805" 0805 137.156,113 r90 top value=100K (schematic designator R19)
R20_Axis1 "Resistor 0805" 0805 151.156,113 r90 top value=100K (schematic designator R20)
R21_Axis1 "Resistor 0805" 0805 165.156,113 r90 top value=100K (schematic designator R21)
R22_Axis1 "Current Shunt" 2512 58.156,116 r90 top value="5 mOhm" (schematic designator R22)
R23_Axis1 "Current Shunt" 2512 72.156,116 r90 top value="5 mOhm" (schematic designator R23)
R24_Axis1 "Current Shunt" 2512 86.156,116 r90 top value="5 mOhm" (schematic designator R24)
R27_Axis1 "Resistor 0805" 0805 161.481,58 r90 top value=140K (schematic designator R27)
R28_Axis1 "Resistor 0805" 0805 189.481,58 r90 top value=10K (schematic designator R28)
R29_Axis1 "Resistor 0805" 0805 308.156,3 r90 top value=162K (schematic designator R29)
R30_Axis1 "Resistor 0805" 0805 253.156,3 r90 top value=10K (schematic designator R30)
R31_Axis1 "Resistor 0805" 0805 267.156,3 r90 top value=200K (schematic designator R31)
R32_Axis1 "Resistor 0805" 0805 210.156,3 r90 top value=15K (schematic designator R32)
R33_Axis1 "Resistor 0805" 0805 182.156,3 r90 top value=20K (schematic designator R33)
R36_Axis1 "Resistor 0805" 0805 209.475,81.95 r90 top value=140K (schematic designator R36)
R37_Axis1 "Resistor 0805" 0805 152.475,81.95 r90 top value=162K (schematic designator R37)
R38_Axis1 "Resistor 0805" 0805 325.15,27 r90 top value=10K (schematic designator R38)
R39_Axis1 "Resistor 0805" 0805 138.475,81.95 r90 top value=200K (schematic designator R39)
R40_Axis1 "Resistor 0805" 0805 296.15,27 r90 top value=15K (schematic designator R40)
R40_Axis2 "Resistor 0805" 0805 132.475,91 r90 top value=15K (schematic designator R40)
R41_Axis1 "Resistor 0805" 0805 197.15,27 r90 top value=20K (schematic designator R41)
R41_Axis2 "Resistor 0805" 0805 234.15,36 r90 top value=20K (schematic designator R41)
R42_Axis1 "Resistor 0805" 0805 211.15,27 r90 top value=330 (schematic designator R42)
R42_Axis2 "Resistor 0805" 0805 248.15,36 r90 top value=330 (schematic designator R42)
R43_Axis1 "Resistor 0805" 0805 225.15,27 r90 top value=330 (schematic designator R43)
R43_Axis2 "Resistor 0805" 0805 263.15,36 r90 top value=330 (schematic designator R43)
R44_Axis1 "Resistor 0805" 0805 239.15,27 r90 top value=330 (schematic designator R44)
R44_Axis2 "Resistor 0805" 0805 277.15,36 r90 top value=330 (schematic designator R44)
R45_Axis1 "Resistor 0805" 0805 254.15,27 r90 top value=330 (schematic designator R45)
R45_Axis2 "Resistor 0805" 0805 292.15,36 r90 top value=330 (schematic designator R45)
R46_Axis1 "Resistor 0805" 0805 268.15,27 r90 top value=330 (schematic designator R46)
R46_Axis2 "Resistor 0805" 0805 307.15,36 r90 top value=330 (schematic designator R46)
R47_Axis1 "Resistor 0805" 0805 282.15,27 r90 top value=330 (schematic designator R47)
R47_Axis2 "Resistor 0805" 0805 322.15,36 r90 top value=330 (schematic designator R47)
R?_Axis1 "Resistor" 0805 85.481,182 r90 top value=120 (schematic designator R?)
R?_Axis1 "Resistor" 0805 124.481,182 r90 top value=120 (schematic designator R?)
R?_Axis1 "Resistor" 0805 141.156,3 r90 top value=120 (schematic designator R?)
R?_Axis1 "Resistor" 0805 331.475,82 r90 top value=120 (schematic designator R?)
U?_Axis1_Axis1 "STM32G431RBT6" LQFP-64_10x10_P0.5 57.48,186.675 r90 top (schematic designator U?_Axis1)
U?_Axis1_Axis1 "SN65HVD75DR" SOIC-8 74,78 r90 top (schematic designator U?_Axis1)
U?_Axis1_Axis1 "LM7805" TO-263-3 20,32 r0 top (schematic designator U?_Axis1)
U?_Axis1_Axis1 "TPS54360BDDAR" HSOIC-8-DDA 77.65,36.986 r0 top (schematic designator U?_Axis1)
U?_Axis1_Axis1 "UCC27201ADDA" SOIC-8_PowerPAD_DDA 60.508,16.306 r90 top (schematic designator U?_Axis1)
U?_Axis1_Axis1 "STM32G431RBT6" LQFP-64_10x10_P0.5 92,51 r0 top (schematic designator U?_Axis1)
U?_Axis1_Axis1 "UCC27201ADDA" SOIC-8_PowerPAD_DDA 85.908,16.306 r90 top (schematic designator U?_Axis1)
U?_Axis1_Axis1 "SN65HVD75DR" SOIC-8 49,79 r90 top (schematic designator U?_Axis1)
U?_Axis1_Axis1 "INA240A1DR" SOIC-8 35.232,36.605 r90 top (schematic designator U?_Axis1)
U?_Axis1_Axis1 "SN65HVD75DR" SOIC-8 37,77 r90 top (schematic designator U?_Axis1)
U?_Axis1_Axis1 "SN65HVD75DR" SOIC-8 68.966,90.165 r90 top (schematic designator U?_Axis1)
U?_Axis1_Axis1 "LM1117-3.3" SOT-223 65.839,36.859 r0 top (schematic designator U?_Axis1)
U?_Axis1_Axis1 "UCC27201ADDA" SOIC-8_PowerPAD_DDA 73.208,16.306 r90 top (schematic designator U?_Axis1)
U?_Axis1_Axis1 "INA240A1DR" SOIC-8 47.808,16.433 r90 top (schematic designator U?_Axis1)
U?_Axis1_Axis1 "SN65HVD75DR" SOIC-8 8,10 r90 top (schematic designator U?_Axis1)
U?_Axis1_Axis1 "TPS54360BDDAR" HSOIC-8-DDA 33.454,57.814 r0 top (schematic designator U?_Axis1)
U?_Axis1_Axis1 "SN65HVD75DR" SOIC-8 60,79 r90 top (schematic designator U?_Axis1)
U?_Axis1_Axis1 "TPS54360BDDAR" HSOIC-8-DDA 84.684,81.798 r0 top (schematic designator U?_Axis1)
Y?_Axis1 "OSC" hc-49sm 296.156,9 r90 top value="8 MHz" (schematic designator Y?)

## Footprints (in the part's own frame and the unit in brackets; to place one, negate y for a bottom-side part, rotate by r counter-clockwise, add the part's x,y. Pads: shape width x height; smd on the part's side, far side on the other; paste and mask are expansions set on the pad)
0805 [mm]
  rrect4% 1x1.5 smd: 1(-1.1,0) 2(1.1,0)
  silkscreen extent -1.9,-1.1 1.9,1.1
1206 [mm]
  rect 1x1.8 smd: 1(-1.4,0) 2(1.4,0)
  silkscreen extent -2.2,-1.3 2.3,1.3
2512 [mm] "Shunt"
  rrect10% 2.11x3.68 smd: 1(-2.645,0) 2(2.645,0)
  silkscreen extent -4.1,-2.3 4.1,2.3
B8B-EH-A-(LF)(SN) [mm] "M-JST 8 pin"
  rect 1.6x1.6 hole 1.1: 1(-8.694,0.024)
  round 1.6 hole 1.1: 2(-6.194,0.024) 3(-3.694,0.024) 4(-1.194,0.024) 5(1.306,0.024) 6(3.806,0.024) 7(6.306,0.024) 8(8.806,0.024)
  silkscreen extent -10,-2.5 10,2.5
"ECAP SMD 8x10.5" [mm] "8x10.5"
  rrect10% 1.6x3.6 smd: 1(0,3.35) 2(0,-3.35)
  silkscreen extent -4.15,-4.15 4.15,4.15
hc-49sm [mm]
  rrect30% 6x2 smd: 1(-4.5,0) 2(4.5,0)
  silkscreen extent -5.7,-2.4 5.7,2.4
HEADER_2x3 [mm]
  rect 1.5x1.5 / inner round 1.5 / far side round 1.5 hole 1: 1(-1.33,2.955)
  round 1.5 hole 1: 2(1.21,2.955) 3(-1.33,0.415) 4(1.21,0.415) 5(-1.33,-2.125) 6(1.21,-2.125)
  silkscreen extent -2.34,-3.31 2.3,4.07
HSOIC-8-DDA [mm] "HSIOC8 with thermal pad"
  rrect8% 0.45x2.15 smd: 1(-1.905,-2.875) 2(-0.635,-2.875) 3(0.635,-2.875) 4(1.905,-2.875) 5(1.905,2.875) 6(0.635,2.875) 7(-0.635,2.875) 8(-1.905,2.875)
  rrect1% 3.1x2.4 smd: 9(0,0)
  round 0.33 on Mech2: 16(0,0.65) 17(0,-0.65) 18(-1.3,-0.65) 18(1.3,-0.65) 19(-1.3,0.65) 19(1.3,0.65)
  silkscreen extent -2.35,-4.21 2.48,4.22
LQFP-64_10x10_P0.5 [mm] "TSQFP, 64-Leads, Body 10,00x10,00mm, Pitch 0,50mm, IPC Medium Density"
  oval 0.3x1.4 smd: 1(-3.75,-5.7) 2(-3.25,-5.7) 3(-2.75,-5.7) 4(-2.25,-5.7) 5(-1.75,-5.7) 6(-1.25,-5.7) 7(-0.75,-5.7) 8(-0.25,-5.7) 9(0.25,-5.7) 10(0.75,-5.7) 11(1.25,-5.7) 12(1.75,-5.7) 13(2.25,-5.7) 14(2.75,-5.7) 15(3.25,-5.7) 16(3.75,-5.7) 33(3.75,5.7) 34(3.25,5.7) 35(2.75,5.7) 36(2.25,5.7) 37(1.75,5.7) 38(1.25,5.7) 39(0.75,5.7) 40(0.25,5.7) 41(-0.25,5.7) 42(-0.75,5.7) 43(-1.25,5.7) 44(-1.75,5.7) 45(-2.25,5.7) 46(-2.75,5.7) 47(-3.25,5.7) 48(-3.75,5.7)
  oval 1.4x0.3 smd: 17(5.7,-3.75) 18(5.7,-3.25) 19(5.7,-2.75) 20(5.7,-2.25) 21(5.7,-1.75) 22(5.7,-1.25) 23(5.7,-0.75) 24(5.7,-0.25) 25(5.7,0.25) 26(5.7,0.75) 27(5.7,1.25) 28(5.7,1.75) 29(5.7,2.25) 30(5.7,2.75) 31(5.7,3.25) 32(5.7,3.75) 49(-5.7,3.75) 50(-5.7,3.25) 51(-5.7,2.75) 52(-5.7,2.25) 53(-5.7,1.75) 54(-5.7,1.25) 55(-5.7,0.75) 56(-5.7,0.25) 57(-5.7,-0.25) 58(-5.7,-0.75) 59(-5.7,-1.25) 60(-5.7,-1.75) 61(-5.7,-2.25) 62(-5.7,-2.75) 63(-5.7,-3.25) 64(-5.7,-3.75)
  silkscreen extent -4.6,-5.82 4.6,4.6, body extent -5,-5 5,5, height 1.6
SMB [mm]
  rrect22% 1.8x2.5 smd: 1(-1.95,0) 2(1.95,0)
  silkscreen extent -3.3,-1.6 3.4,1.6
"SMD IND 104CDMCCDS-220MC" [mm] "22u 5.5A"
  rrect10% 4.1x4.1 smd: 1(-4.75,0) 2(4.75,0)
  silkscreen extent -5.5,-5 5.5,5
SOIC-8 [mm]
  rrect0% 1.55x0.6 smd: 1(-2.75,1.925) 2(-2.75,0.65) 3(-2.75,-0.625) 4(-2.75,-1.9) 5(2.725,-1.9) 6(2.725,-0.625) 7(2.725,0.65) 8(2.725,1.925)
  silkscreen extent -3.88,-2.55 3.88,2.55
SOIC-8_PowerPAD_DDA [mm]
  rrect0% 1.55x0.6 smd: 1(-2.7,1.925) 2(-2.7,0.65) 3(-2.7,-0.625) 4(-2.7,-1.9) 5(2.675,-1.9) 6(2.675,-0.625) 7(2.675,0.65) 8(2.675,1.925)
  rrect0% 1.8x0.6 smd: 9(0,0.95) 9(0,0) 9(0,-0.95)
  silkscreen extent -3.8,-2.52 3.8,2.55
SOT-223 [mm]
  rrect4% 0.95x2.15 smd: 1(-2.3,-2.9) 2(0,-2.9) 3(2.3,-2.9)
  rrect1% 3.25x2.15 smd: 4(0,2.9)
  Top Layer 1 region: -0.475,-3.975 0.475,-3.975 0.475,-1.825 -0.475,-1.825
  Top Layer 1 region: 1.825,-3.975 2.775,-3.975 2.775,-1.825 1.825,-1.825
  Top Layer 1 region: -2.775,-3.975 -1.825,-3.975 -1.825,-1.825 -2.775,-1.825
  silkscreen extent -3.25,-4.18 3.22,4.23
SuperSO8 [mm]
  rrect8% 0.5x0.925 smd paste-2539.97: 1(-1.905,-2.928) 2(-0.635,-2.93) 3(0.635,-2.93) 4(1.905,-2.93)
  rrect6% 0.6x0.8 smd paste-2539.97: 5(-1.905,2.86) 6(-0.635,2.86) 7(0.635,2.86) 8(1.905,2.86)
  rrect1% 4.41x3.655 smd paste-2539.97: 5(0,0.695)
TO-263-3 [mm] "DPAK 3 leg and pad"
  rrect2% 1.5x4.5 smd: 1(-2.54,-5) 2(0,-5) 3(2.54,-5)
  rrect2% 1.5x9.5 smd: 4(-4.1,5) 4(-2,5) 4(0,5) 4(2,5) 4(4.1,5)
  silkscreen extent -5.48,-7.66 5.54,10.38